# EAGLE board Putri Shaqila_supply (EAGLE 9.6.2)
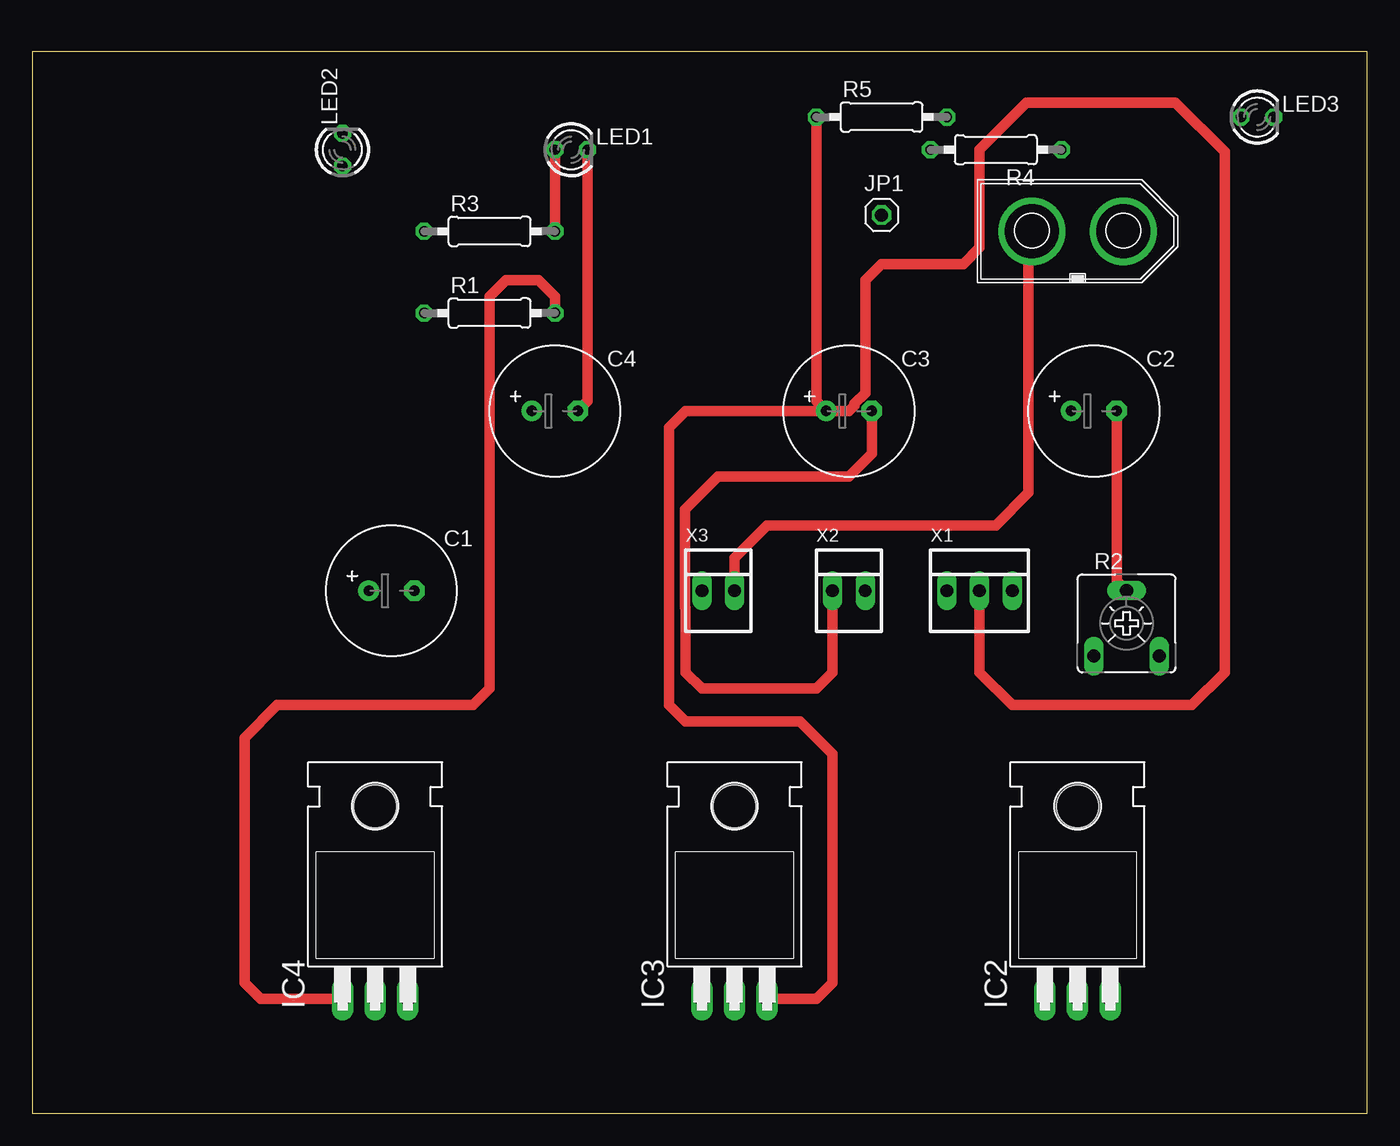
[diagram p0: board, top side]
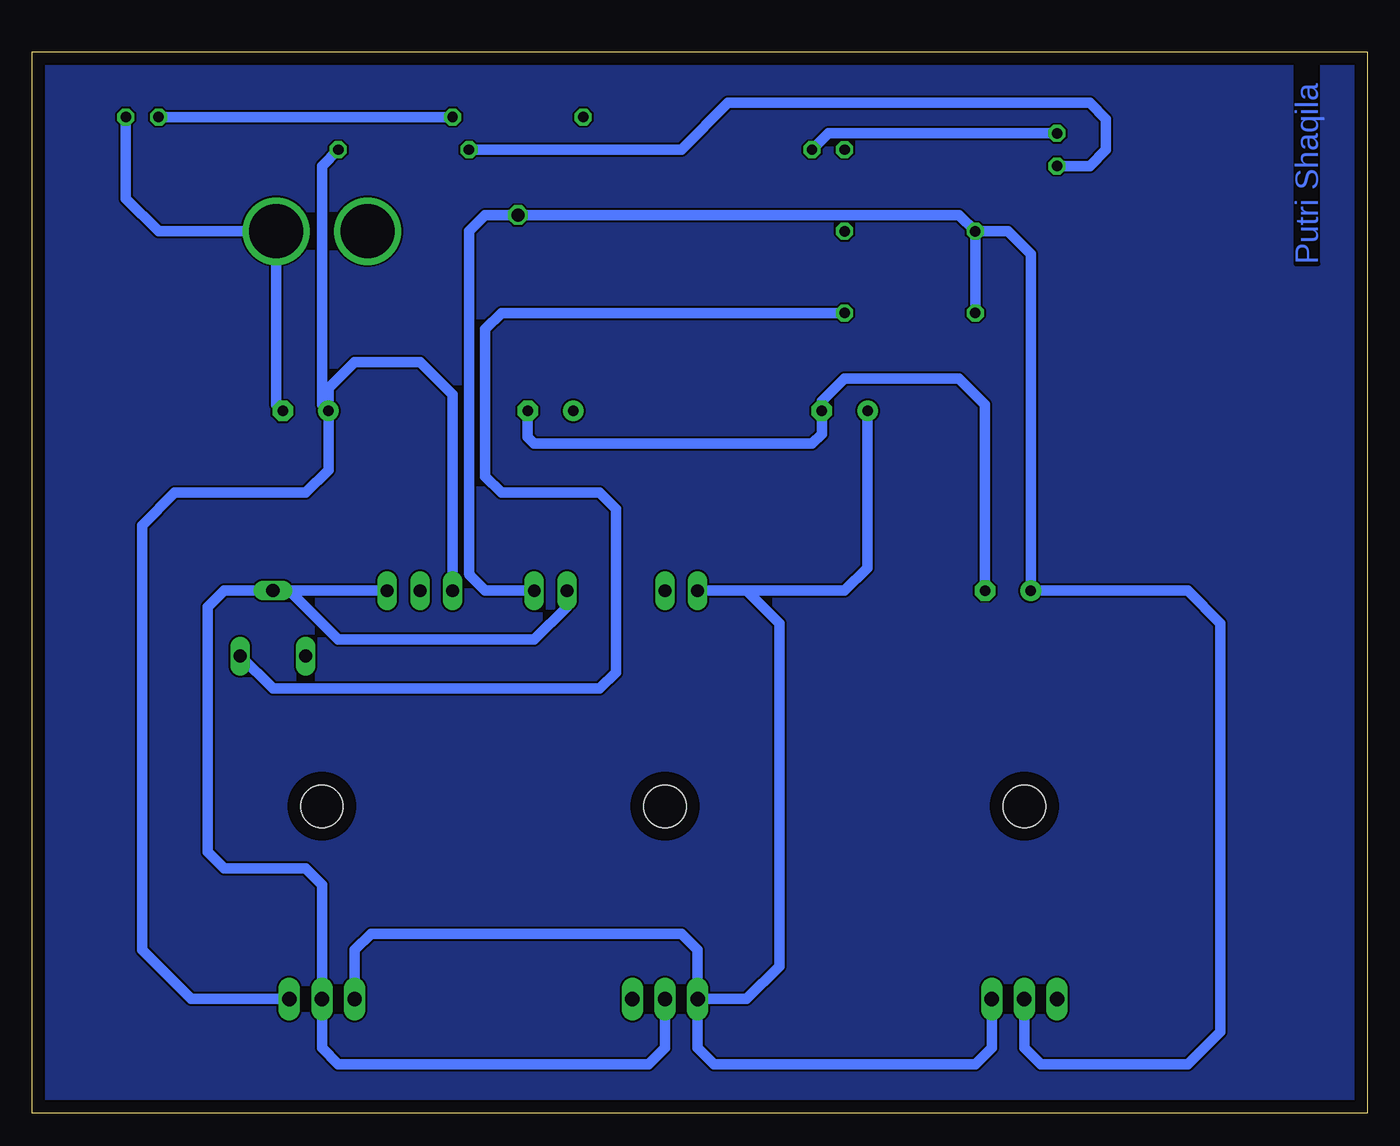
[diagram p1: board, bottom side, seen from below]

Size 103.81 x 82.54 mm. Coordinates in mm from the lower left corner, seen from the top.
Outline: 0,0 103.81,0 103.81,82.54 0,82.54 0,0
Copper layers (1*16): Top 0.035mm / dielectric 1.5mm / Bottom 0.035mm
Design rules "default": minimum track width 6mil, minimum drill 0.35mm, track to track 6mil, track to pad 6mil, pad to pad 6mil, via to via 6mil, smd to smd 6mil, copper to edge 40mil, drill to drill 6mil, minimum pad ring 10mil, minimum via ring 8mil, stop-mask expansion 4mil, vias tented up to drill 0mil, thermal gap 10mil

## Footprints (pad centres in the part's own frame; a part is rotated, then mirrored left to right if it is on the bottom)
E3,5-10 = drill 0.813 pad 1.6: + -1.778,0 | drill 0.813 pad 1.6 octagon: - 1.778,0
TO220H = drill 1.118 long: 1 -2.54,-10.16; 2 0,-10.16; 3 2.54,-10.16 | hole 3.302: 0,4.826
1X01 = drill 1.016 octagon: 1 0,0
LED3MM = drill 0.813 octagon: A -1.27,0; K 1.27,0
0207/10 = drill 0.813 octagon: 1 -5.08,0; 2 5.08,0
CA6V = drill 1.016 long: A -2.54,-2.54; E 2.54,-2.54; S 0,2.54
CON-XT60M = drill 4.2: V+ -3.55,0; V- 3.55,0
22-23-2031 = drill 1 long: 1 -2.54,0; 2 0,0; 3 2.54,0
22-23-2021 = drill 1 long: 1 -1.27,0; 2 1.27,0

## Placement (x,y rotation side)
C1  1000uF/16V  [E3,5-10]  27.94,40.64 0 top
C2  1000uF/16V  [E3,5-10]  82.55,54.61 0 top
C3  1000uF/16V  [E3,5-10]  63.5,54.61 0 top
C4  1000uF/16V  [E3,5-10]  40.64,54.61 0 top
IC2  7805T  [TO220H]  81.28,19.05 0 top
IC3  7805T  [TO220H]  54.61,19.05 0 top
IC4  317T  [TO220H]  26.67,19.05 0 top
JP1  [1X01]  66.04,69.85 0 top
LED1  [LED3MM]  41.91,74.93 0 top
LED2  [LED3MM]  24.13,74.93 90 top
LED3  [LED3MM]  95.25,77.47 0 top
R1  1K2  [0207/10]  35.56,62.23 0 top
R2  20K  [CA6V]  85.09,38.1 0 top
R3  1K  [0207/10]  35.56,68.58 0 top
R4  1K  [0207/10]  74.93,74.93 180 top
R5  1K  [0207/10]  66.04,77.47 0 top
VIN  [CON-XT60M]  81.28,68.58 0 top
X1  VSYS  [22-23-2031]  73.66,40.64 0 top
X2  VMOT  [22-23-2021]  63.5,40.64 0 top
X3  switch  [22-23-2021]  53.34,40.64 0 top

## Library data of the parts
C1-C4 R1 R3-R5 = rcl
IC2-IC4 = linear
JP1 = pinhead
LED1-LED3 = led
R2 = pot
VIN = con-XT60M
X1 = con-molex; MF: MOLEX; MPN: 22-23-2031; OC_FARNELL: 1462950; OC_NEWARK: 30C0862
X2 X3 = con-molex; MF: MOLEX; MPN: 22-23-2021; OC_FARNELL: 1462926; OC_NEWARK: 25C3832

## Nets
+12V: C3.+ IC3.3 R5.1 X1.2
GND: C1.- C2.- C3.- C4.- IC2.2 IC3.2 LED1.K LED2.K LED3.K R2.S VIN.V- X1.3 X2.1
N$1: IC4.1 R1.2 R2.E
N$2: LED1.A R3.2
N$3: LED3.A R5.2
N$4: VIN.V+ X3.2
N$5: LED2.A R4.2
VCC: C2.+ IC2.3 R4.1 X1.1
VDD: C1.+ IC4.2 JP1.1 R1.1 R3.1 X2.2
VPP: C4.+ IC2.1 IC3.1 IC4.3 X3.1

## Tracks (layer width: path | path; a pad name or v marks a point on that pad's centre or on a via)
+12V
  Top 0.813: R5.1 60.96,55.37 C3.+ | C3.+ 50.8,54.61 49.53,53.34 49.53,31.75 50.8,30.48 59.69,30.48 62.23,27.94 62.23,10.16 60.96,8.89 IC3.3 | C3.+ 63.5,54.61 63.92,55.03 63.92,55.17 64.77,56.02 64.77,64.77 66.04,66.04 72.39,66.04 73.66,67.31 73.66,74.93 77.31,78.58 88.9,78.58 92.71,74.77 92.71,34.29 90.17,31.75 76.2,31.75 73.66,34.29 X1.2
GND
  Top 0.813: LED1.K 43.18,55.37 C4.- | C2.- 84.33,41.4 R2.S | C3.- 65.28,51.31 63.5,49.53 53.34,49.53 50.76,46.95 50.76,39.34 50.8,39.3 50.8,34.29 52.07,33.02 60.96,33.02 62.23,34.29 X2.1
  Bottom 0.813: IC3.2 54.61,5.08 55.88,3.81 80.01,3.81 81.28,5.08 IC2.2 81.28,17.78 82.55,19.05 88.9,19.05 90.17,20.32 90.17,39.37 88.9,40.64 R2.S | C1.- 29.72,55.12 31.75,57.15 40.64,57.15 42.42,55.37 C4.- 42.42,52.83 43.18,52.07 64.77,52.07 65.28,52.58 C3.- | X2.1 62.23,39.37 64.77,36.83 80.01,36.83 83.82,40.64 R2.S | X1.3 R2.S | C2.- 84.83,55.11 VIN.V- 93.98,68.58 96.52,71.12 LED3.K | LED1.K 41.91,76.2 LED2.K
N$1
  Top 0.813: IC4.1 17.78,8.89 16.51,10.16 16.51,29.21 19.05,31.75 34.29,31.75 35.56,33.02 35.56,63.5 36.83,64.77 39.37,64.77 40.64,63.5 R1.2
  Bottom 0.813: R2.E 85.09,33.02 59.69,33.02 58.42,34.29 58.42,46.99 59.69,48.26 67.31,48.26 68.58,49.53 68.58,60.96 67.31,62.23 R1.2
N$2
  Top 0.813: LED1.A R3.2
N$3
  Bottom 0.813: R5.2 LED3.A
N$4
  Top 0.813: VIN.V+ 77.47,68.32 77.47,48.26 74.93,45.72 57.15,45.72 54.61,43.18 X3.2
N$5
  Bottom 0.813: LED2.A 21.59,73.66 20.32,74.93 20.32,77.31 21.59,78.58 49.69,78.58 53.34,74.93 R4.2
N$6
  pour Bottom: 0,82.55 0,0 102.87,0 104.14,0 104.14,82.55
VCC
  Bottom 0.813: IC2.3 91.44,8.89 95.25,12.7 95.25,45.72 92.71,48.26 82.55,48.26 80.77,50.04 C2.+ | C2.+ 80.77,56.39 78.74,58.42 73.66,58.42 71.12,55.88 X1.1 | R4.1 81.28,73.66 81.28,55.12 C2.+
VDD
  Bottom 0.813: IC4.2 26.67,5.08 25.4,3.81 13.97,3.81 11.43,6.35 11.43,38.1 13.97,40.64 C1.+ 26.16,66.8 27.94,68.58 R3.1 | R3.1 R1.1 | X2.2 68.58,40.64 69.81,41.87 69.81,41.94 69.85,41.98 69.85,68.58 68.58,69.85 JP1.1 31.75,69.85 R3.1
VPP
  Bottom 0.813: IC4.3 29.21,5.08 30.48,3.81 50.8,3.81 52.07,5.08 IC3.1 | IC3.1 52.07,12.7 53.34,13.97 77.47,13.97 78.74,12.7 IC2.1 | C4.+ 38.86,42.42 40.64,40.64 X3.1 48.26,40.64 45.72,38.1 45.72,11.43 48.26,8.89 IC3.1

## Text on the board
Bottom: Putri Shaqila